# Altium PCB esc.PcbDoc (part 1 of 3)
Units mm, origin at the board's own origin, x right, y up, seen from the top; angles counter-clockwise.
Board outline 31 x 31 mm, 4 copper layers (Top Layer, Ground, Power, Bottom Layer), stack 0.971 mm thick; 336 components, 195 nets, 854 pads, 360 vias.
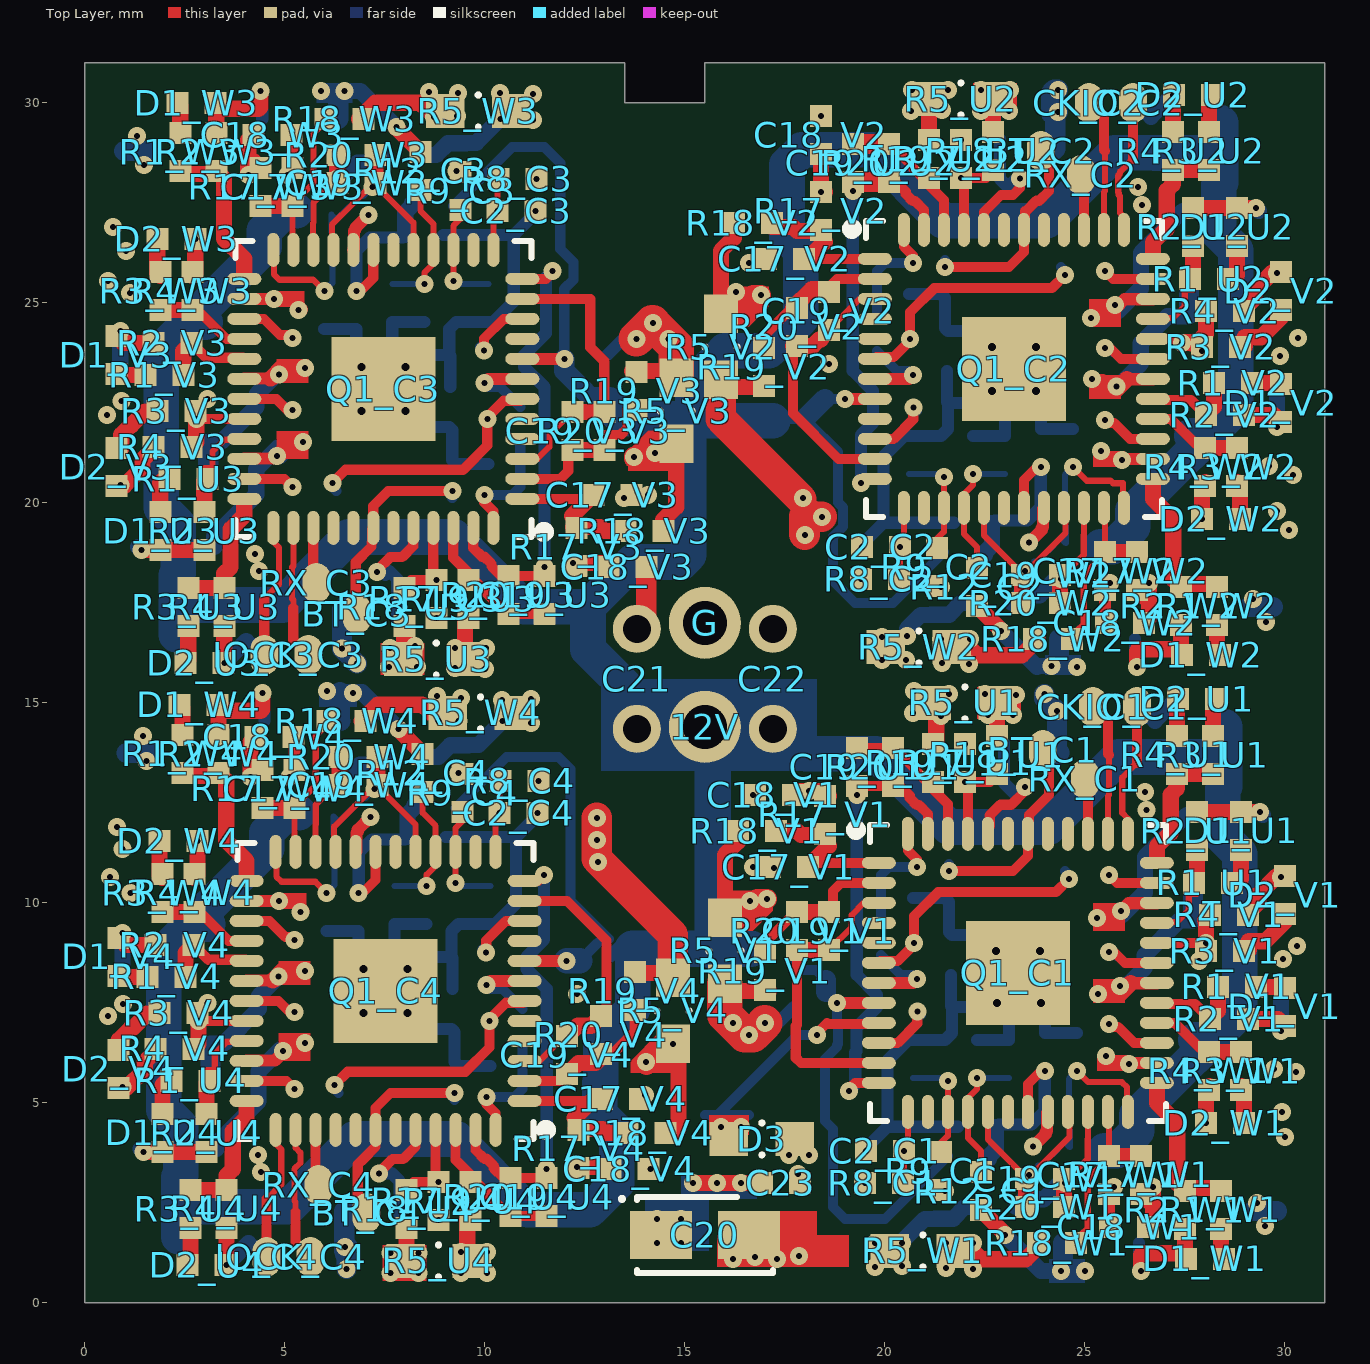
[diagram p0: Top Layer view]
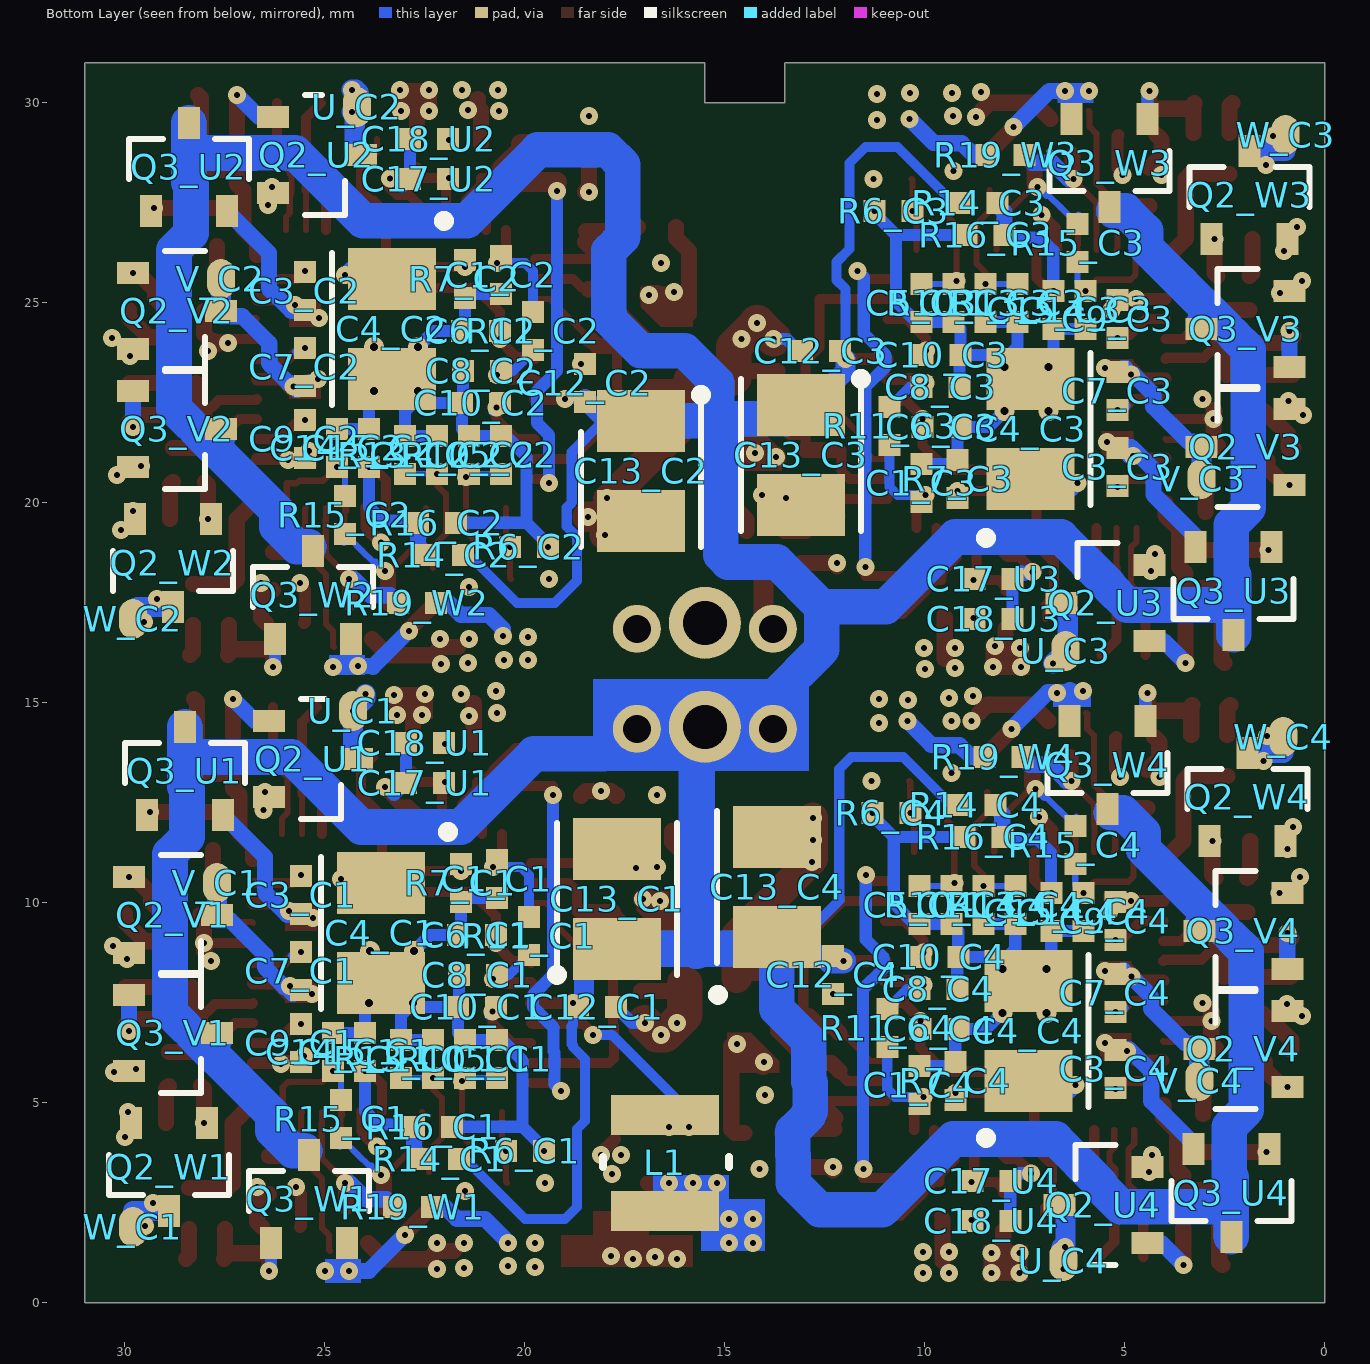
[diagram p1: Bottom Layer view, seen from below]
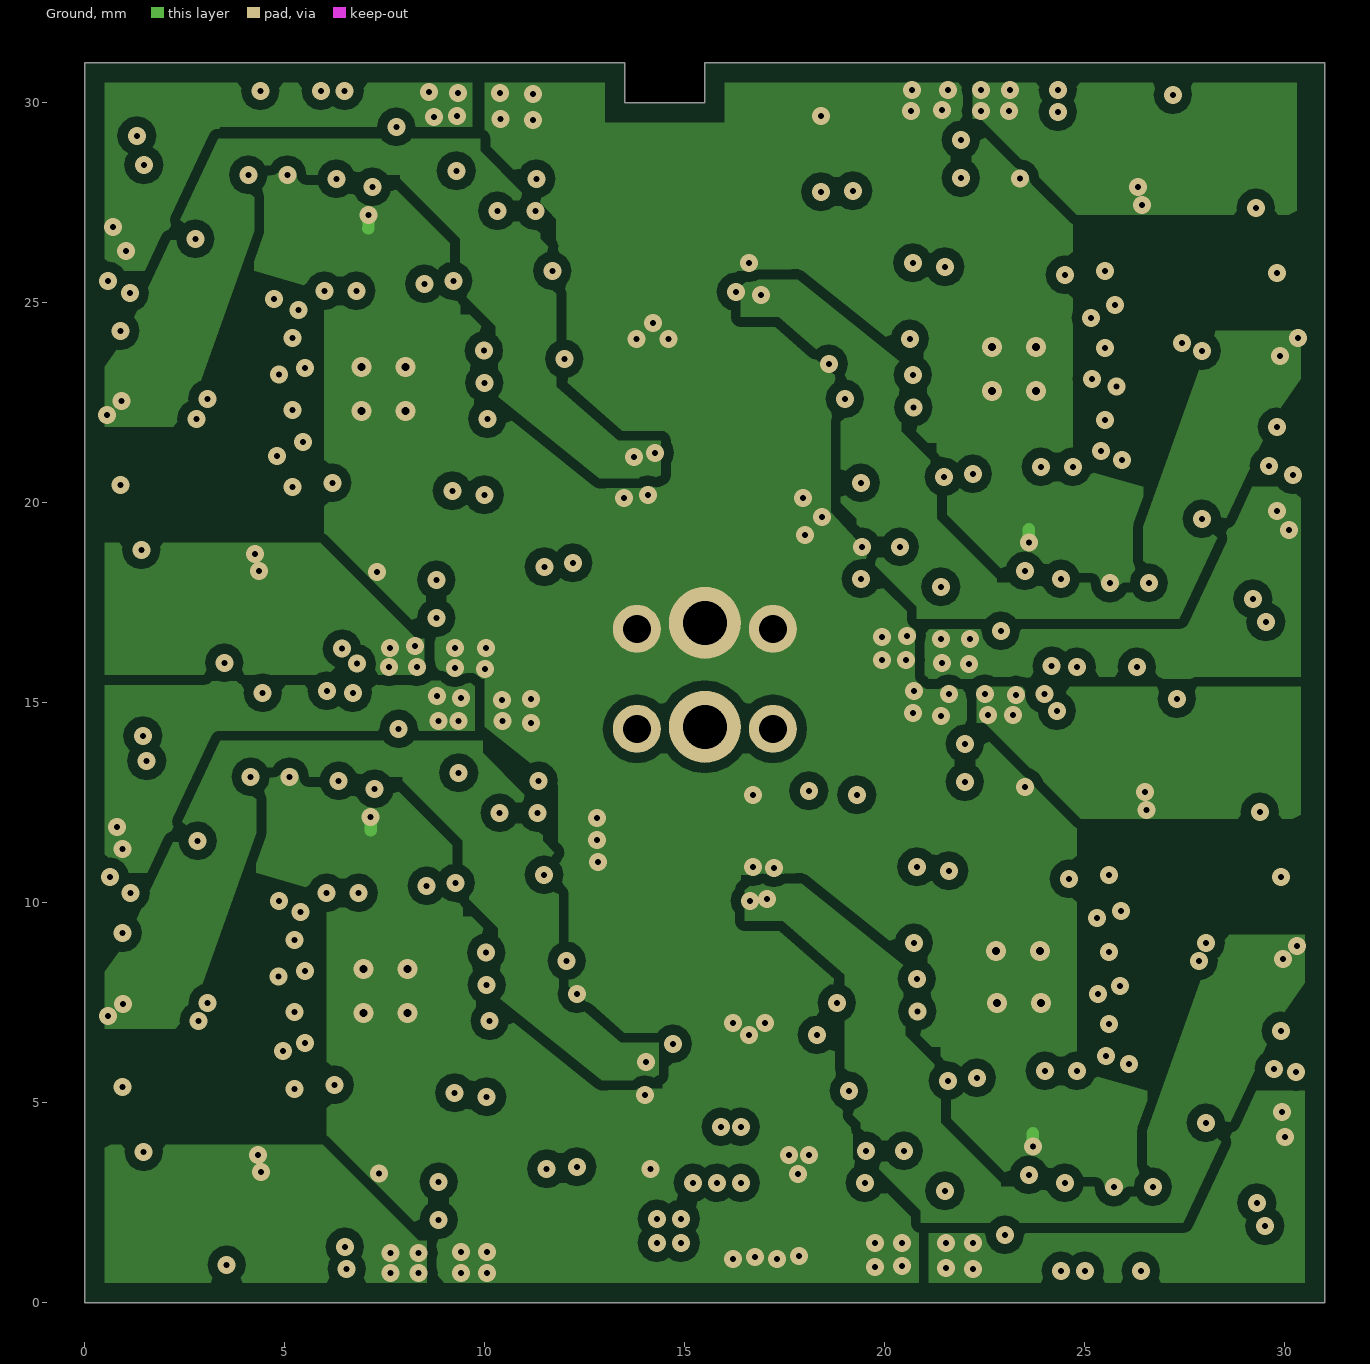
[diagram p2: Ground]
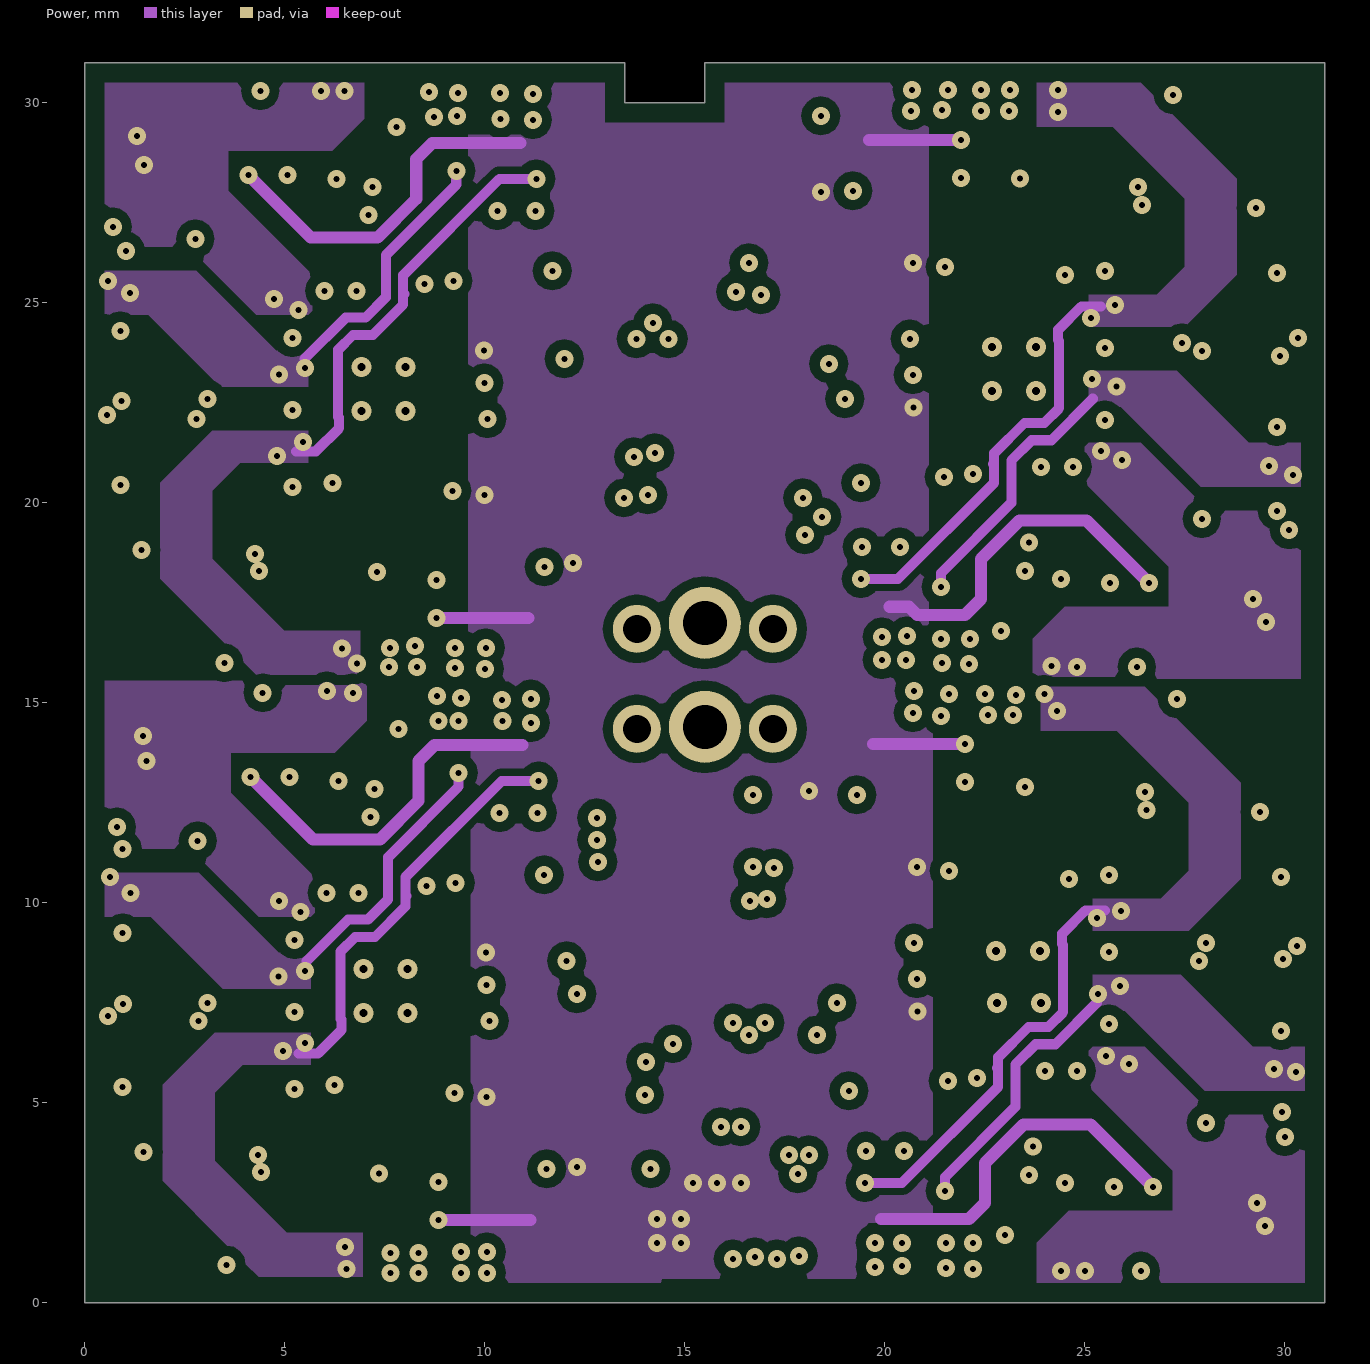
[diagram p3: Power]

## Layer stack, top to bottom
Top Solder: solder mask 0.0102, Solder Resist, Dk 3.5
Top Layer: signal copper 0.0356
Dielectric 1: dielectric 0.32, FR-4, Dk 4.8
Ground: signal copper 0.036
Dielectric 2: dielectric 0.254, Dk 4.2
Power: signal copper 0.036
Dielectric 3: dielectric 0.254, Dk 4.2
Bottom Layer: signal copper 0.0356
Bottom Solder: solder mask 0.0102, Solder Resist, Dk 3.5

## Board outline
0,0 0,31 13.5,31 13.5,30 15.5,30 15.5,31 31,31 31,0

## Design rules (kind name [scope] priority, off if disabled: settings)
Clearance Clearance_fake_net [HasFootprint('fake_net')] p1: gap=0 ignorepadtopadclearanceinfootprint=FALSE
Clearance Clearance_fake_net_2 [HasFootprint('fake_net_10mil')] p2: gap=0 ignorepadtopadclearanceinfootprint=FALSE
Clearance Clearance_fake_net_1 [HasFootprint('fake_net_30mil')] p3: gap=0 ignorepadtopadclearanceinfootprint=FALSE
Clearance [All] p4: gap=0.178 ignorepadtopadclearanceinfootprint=FALSE except(0: Arc-Hole Track-Hole SMDPad-Hole THPad-Hole Via-Hole Fill-Hole Poly-Hole Region-Hole Text-Hole; 0.254: THPad-THPad THPad-Via THPad-Fill THPad-Poly THPad-Region THPad-Text Via-Via Via-Fill Via-Poly Via-Region Via-Text Fill-Fill Fill-Poly Fill-Region Fill-Text Poly-Poly Poly-Region Poly-Text Region-Region Region-Text Text-Text)
ComponentClearance [All] p1: gap=0.152 collisioncheckmode=3 verticalgap=0.254 showdistances=FALSE
HoleToHoleClearance [All] p1: gap=0.229 allowstackedmicrovias=TRUE
MinimumSolderMaskSliver [All] p1: minsoldermaskwidth=0.102
PlaneClearance [All] p1: clearance=0.203
PlaneConnect [All] p1: planeconnectstyle=Direct reliefexpansion=0.508 reliefentries=4 reliefconductorwidth=0.254 reliefairgap=0.254
PolygonConnect PolygonConnect_bottom [OnLayer('Bottom Layer') And IsPolygon] p1: connectstyle=Relief reliefconductorwidth=0.152 reliefentries=4 polygonreliefangle="90 Angle" airgapwidth=0.152
PolygonConnect [All] p2: connectstyle=Direct reliefconductorwidth=0.152 reliefentries=4 polygonreliefangle="90 Angle" airgapwidth=0.152
RoutingVias [All] p1: holewidth=0.15 width=0.45 viastyle="Through Hole" minholewidth=0.15 minwidth=0.45 maxholewidth=0.15 maxwidth=0.45
SilkToSolderMaskClearance [IsPad] p1: minsilkscreentomaskgap=0.127 clearancetoexposedcopper=TRUE
SolderMaskExpansion [All] p1: expansion=0.102
Width Width_hc [InNetClass('hc')] p1: maxlimit=12.7 minlimit=0.254 preferedwidth=0.254
Width [All] p2: maxlimit=12.7 minlimit=0.152 preferedwidth=0.254
24 further rules are at their usual default settings.

## Classes and differential pairs
net class hc: GND NetC3_C1_2 NetC3_C2_2 NetC3_C3_2 NetC3_C4_2 NetC7_C1_2 NetC7_C2_2 NetC7_C3_2 NetC7_C4_2 NetC9_C1_2 NetC9_C2_2 NetC9_C3_2 NetC9_C4_2 NetQ2_U1_S NetQ2_U2_S NetQ2_U3_S NetQ2_U4_S NetQ2_V1_S NetQ2_V2_S NetQ2_V3_S NetQ2_V4_S NetQ2_W1_S NetQ2_W2_S NetQ2_W3_S NetQ2_W4_S VBUS
component class C1: BT_C1 C1_C1 C2_C1 C3_C1 C4_C1 C5_C1 C6_C1 C7_C1 C8_C1 C9_C1 C10_C1 C11_C1 C12_C1 C13_C1 C14_C1 C15_C1 CK_C1 IO_C1 Q1_C1 R6_C1 R7_C1 R8_C1 R9_C1 R10_C1 R11_C1 R12_C1 R13_C1 R14_C1 R15_C1 R16_C1 RX_C1 U_C1 V_C1 W_C1
component class C2: BT_C2 C1_C2 C2_C2 C3_C2 C4_C2 C5_C2 C6_C2 C7_C2 C8_C2 C9_C2 C10_C2 C11_C2 C12_C2 C13_C2 C14_C2 C15_C2 CK_C2 IO_C2 Q1_C2 R6_C2 R7_C2 R8_C2 R9_C2 R10_C2 R11_C2 R12_C2 R13_C2 R14_C2 R15_C2 R16_C2 RX_C2 U_C2 V_C2 W_C2
component class C3: BT_C3 C1_C3 C2_C3 C3_C3 C4_C3 C5_C3 C6_C3 C7_C3 C8_C3 C9_C3 C10_C3 C11_C3 C12_C3 C13_C3 C14_C3 C15_C3 CK_C3 IO_C3 Q1_C3 R6_C3 R7_C3 R8_C3 R9_C3 R10_C3 R11_C3 R12_C3 R13_C3 R14_C3 R15_C3 R16_C3 RX_C3 U_C3 V_C3 W_C3
component class C4: BT_C4 C1_C4 C2_C4 C3_C4 C4_C4 C5_C4 C6_C4 C7_C4 C8_C4 C9_C4 C10_C4 C11_C4 C12_C4 C13_C4 C14_C4 C15_C4 CK_C4 IO_C4 Q1_C4 R6_C4 R7_C4 R8_C4 R9_C4 R10_C4 R11_C4 R12_C4 R13_C4 R14_C4 R15_C4 R16_C4 RX_C4 U_C4 V_C4 W_C4
component class esc: 12V C20 C21 C22 C23 D3 G L1
component class U1: C17_U1 C18_U1 C19_U1 D1_U1 D2_U1 Q2_U1 Q3_U1 R1_U1 R2_U1 R3_U1 R4_U1 R5_U1 R17_U1 R18_U1 R19_U1 R20_U1
component class U2: C17_U2 C18_U2 C19_U2 D1_U2 D2_U2 Q2_U2 Q3_U2 R1_U2 R2_U2 R3_U2 R4_U2 R5_U2 R17_U2 R18_U2 R19_U2 R20_U2
component class U3: C17_U3 C18_U3 C19_U3 D1_U3 D2_U3 Q2_U3 Q3_U3 R1_U3 R2_U3 R3_U3 R4_U3 R5_U3 R17_U3 R18_U3 R19_U3 R20_U3
component class U4: C17_U4 C18_U4 C19_U4 D1_U4 D2_U4 Q2_U4 Q3_U4 R1_U4 R2_U4 R3_U4 R4_U4 R5_U4 R17_U4 R18_U4 R19_U4 R20_U4
component class V1: C17_V1 C18_V1 C19_V1 D1_V1 D2_V1 Q2_V1 Q3_V1 R1_V1 R2_V1 R3_V1 R4_V1 R5_V1 R17_V1 R18_V1 R19_V1 R20_V1
component class V2: C17_V2 C18_V2 C19_V2 D1_V2 D2_V2 Q2_V2 Q3_V2 R1_V2 R2_V2 R3_V2 R4_V2 R5_V2 R17_V2 R18_V2 R19_V2 R20_V2
component class V3: C17_V3 C18_V3 C19_V3 D1_V3 D2_V3 Q2_V3 Q3_V3 R1_V3 R2_V3 R3_V3 R4_V3 R5_V3 R17_V3 R18_V3 R19_V3 R20_V3
component class V4: C17_V4 C18_V4 C19_V4 D1_V4 D2_V4 Q2_V4 Q3_V4 R1_V4 R2_V4 R3_V4 R4_V4 R5_V4 R17_V4 R18_V4 R19_V4 R20_V4
component class W1: C17_W1 C18_W1 C19_W1 D1_W1 D2_W1 Q2_W1 Q3_W1 R1_W1 R2_W1 R3_W1 R4_W1 R5_W1 R17_W1 R18_W1 R19_W1 R20_W1
component class W2: C17_W2 C18_W2 C19_W2 D1_W2 D2_W2 Q2_W2 Q3_W2 R1_W2 R2_W2 R3_W2 R4_W2 R5_W2 R17_W2 R18_W2 R19_W2 R20_W2
component class W3: C17_W3 C18_W3 C19_W3 D1_W3 D2_W3 Q2_W3 Q3_W3 R1_W3 R2_W3 R3_W3 R4_W3 R5_W3 R17_W3 R18_W3 R19_W3 R20_W3
component class W4: C17_W4 C18_W4 C19_W4 D1_W4 D2_W4 Q2_W4 Q3_W4 R1_W4 R2_W4 R3_W4 R4_W4 R5_W4 R17_W4 R18_W4 R19_W4 R20_W4
net class short: GND NetD1_U1_1 NetD1_U1_2 NetD1_U2_1 NetD1_U2_2 NetD1_U3_1 NetD1_U3_2 NetD1_U4_1 NetD1_U4_2 NetD1_V1_1 NetD1_V1_2 NetD1_V2_1 NetD1_V2_2 NetD1_V3_1 NetD1_V3_2 NetD1_V4_1 NetD1_V4_2 NetD1_W1_1 NetD1_W1_2 NetD1_W2_1 NetD1_W2_2 NetD1_W3_1 NetD1_W3_2 NetD1_W4_1 NetD1_W4_2 NetD2_U1_1 NetD2_U2_1 NetD2_U3_1 NetD2_U4_1 NetD2_V1_1 NetD2_V2_1 NetD2_V3_1 NetD2_V4_1 NetD2_W1_1 NetD2_W2_1 NetD2_W3_1 NetD2_W4_1 NetD3_2 NetQ1_C1_25 NetQ1_C1_28 NetQ1_C1_29 NetQ1_C1_32 NetQ1_C1_33 NetQ1_C1_36 NetQ1_C2_25 NetQ1_C2_28 NetQ1_C2_29 NetQ1_C2_32 NetQ1_C2_33 NetQ1_C2_36 NetQ1_C3_25 NetQ1_C3_28 NetQ1_C3_29 NetQ1_C3_32 NetQ1_C3_33 NetQ1_C3_36 NetQ1_C4_25 NetQ1_C4_28 NetQ1_C4_29 NetQ1_C4_32 NetQ1_C4_33 NetQ1_C4_36 NetQ2_U1_S NetQ2_U2_S NetQ2_U3_S NetQ2_U4_S NetQ2_V1_S NetQ2_V2_S NetQ2_V3_S NetQ2_V4_S NetQ2_W1_S NetQ2_W2_S NetQ2_W3_S NetQ2_W4_S SN1_C1 SN1_C2 SN1_C3 SN1_C4 SN2_C1 SN2_C2 SN2_C3 SN2_C4 SN3_C1 SN3_C2 SN3_C3 SN3_C4 SO1_C1 SO1_C2 SO1_C3 SO1_C4 SO2_C1 SO2_C2 SO2_C3 SO2_C4 SO3_C1 SO3_C2 SO3_C3 SO3_C4 SP1_C1 SP1_C2 SP1_C3 SP1_C4 SP2_C1 SP2_C2 SP2_C3 SP2_C4 SP3_C1 SP3_C2 SP3_C3 SP3_C4
channel class channel: C1 C2 C3 C4
channel class driver: U1 U2 U3 U4 V1 V2 V3 V4 W1 W2 W3 W4

## Components (designator, comment, footprint, x,y, rotation, side; value= is the part's Value field where it differs from the comment)
12V "12V" large_pin 15.5,14.4 r0 top
BT_C1 "BT" solder_pin_small#1 -3.99,13.825 r180 top (schematic designator BT)
BT_C2 "BT" solder_pin_small#2 23.9,28.8 r180 top (schematic designator BT)
BT_C3 "BT" solder_pin_small#2 6.8,17.225 r0 top (schematic designator BT)
BT_C4 "BT" solder_pin_small#2 7.041,2.25 r0 top (schematic designator BT)
C1_C1 "100nF" MY_0402 20.7,10.6 r90 bottom (schematic designator C1)
C1_C2 "100nF" MY_0402 20.6,25.7 r90 bottom (schematic designator C1)
C1_C3 "100nF" MY_0402 10.085,20.5 r270 bottom (schematic designator C1)
C1_C4 "100nF" MY_0402 10.141,5.45 r270 bottom (schematic designator C1)
C2_C1 "100nF" MY_0402 20,3.8 r180 top value=4.7nF (schematic designator C2)
C2_C2 "100nF" MY_0402 19.9,18.9 r180 top value=4.7nF (schematic designator C2)
C2_C3 "100nF" MY_0402 10.785,27.3 r0 top value=4.7nF (schematic designator C2)
C2_C4 "100nF" MY_0402 10.841,12.25 r0 top value=4.7nF (schematic designator C2)
C3_C1 "100nF/25V" MY_0402 25.6,10.2 r270 bottom value=100nF (schematic designator C3)
C3_C2 "100nF/25V" MY_0402 25.5,25.3 r270 bottom value=100nF (schematic designator C3)
C3_C3 "100nF/25V" MY_0402 5.185,20.9 r90 bottom value=100nF (schematic designator C3)
C3_C4 "100nF/25V" MY_0402 5.241,5.85 r90 bottom value=100nF (schematic designator C3)
C4_C1 "TCJB226M025R0150" my_1210_pol 23.6,9.25 r270 bottom value="22uF 25V" (schematic designator C4)
C4_C2 "TCJB226M025R0150" my_1210_pol 23.325,24.35 r270 bottom value="22uF 25V" (schematic designator C4)
C4_C3 "TCJB226M025R0150" my_1210_pol 7.36,21.85 r90 bottom value="22uF 25V" (schematic designator C4)
C4_C4 "TCJB226M025R0150" my_1210_pol 7.416,6.8 r90 bottom value="22uF 25V" (schematic designator C4)
C5_C1 "100nF" MY_0402 20.7,6.1 r270 bottom value=4.7nF (schematic designator C5)
C5_C2 "100nF" MY_0402 20.6,21.2 r270 bottom value=4.7nF (schematic designator C5)
C5_C3 "100nF" MY_0402 10.085,25 r90 bottom value=4.7nF (schematic designator C5)
C5_C4 "100nF" MY_0402 10.141,9.95 r90 bottom value=4.7nF (schematic designator C5)
C6_C1 "100nF" MY_0402 21.2,9.2 r180 bottom (schematic designator C6)
C6_C2 "100nF" MY_0402 21.1,24.3 r180 bottom (schematic designator C6)
C6_C3 "100nF" MY_0402 9.585,21.9 r0 bottom (schematic designator C6)
C6_C4 "100nF" MY_0402 9.641,6.85 r0 bottom (schematic designator C6)
C7_C1 "100nF/25V" MY_0402 25.6,8.3 r270 bottom value=100nF (schematic designator C7)
C7_C2 "100nF/25V" MY_0402 25.5,23.4 r270 bottom value=100nF (schematic designator C7)
C7_C3 "100nF/25V" MY_0402 5.185,22.8 r90 bottom value=100nF (schematic designator C7)
C7_C4 "100nF/25V" MY_0402 5.241,7.75 r90 bottom value=100nF (schematic designator C7)
C8_C1 "3.3nF" MY_0402 21.175,8.2 r0 bottom value=100nF (schematic designator C8)
C8_C2 "3.3nF" MY_0402 21.075,23.3 r0 bottom value=100nF (schematic designator C8)
C8_C3 "3.3nF" MY_0402 9.61,22.9 r180 bottom value=100nF (schematic designator C8)
C8_C4 "3.3nF" MY_0402 9.666,7.85 r180 bottom value=100nF (schematic designator C8)
C9_C1 "100nF/25V" MY_0402 25.6,6.5 r270 bottom value=100nF (schematic designator C9)
C9_C2 "100nF/25V" MY_0402 25.5,21.6 r270 bottom value=100nF (schematic designator C9)
C9_C3 "100nF/25V" MY_0402 5.185,24.6 r90 bottom value=100nF (schematic designator C9)
C9_C4 "100nF/25V" MY_0402 5.241,9.55 r90 bottom value=100nF (schematic designator C9)
C10_C1 "100nF" MY_0402 21.2,7.4 r0 bottom (schematic designator C10)
C10_C2 "100nF" MY_0402 21.1,22.5 r0 bottom (schematic designator C10)
C10_C3 "100nF" MY_0402 9.585,23.7 r180 bottom (schematic designator C10)
C10_C4 "100nF" MY_0402 9.641,8.65 r180 bottom (schematic designator C10)
C11_C1 "100nF" MY_0402 22.3,6.1 r270 bottom value=4.7nF (schematic designator C11)
C11_C2 "100nF" MY_0402 22.2,21.2 r270 bottom value=4.7nF (schematic designator C11)
C11_C3 "100nF" MY_0402 8.485,25 r90 bottom value=4.7nF (schematic designator C11)
C11_C4 "100nF" MY_0402 8.541,9.95 r90 bottom value=4.7nF (schematic designator C11)
C12_C1 "220nF/25V" MY_0402 18.2,7.4 r180 bottom value=100nF (schematic designator C12)
C12_C2 "220nF/25V" MY_0402 18.5,23 r90 bottom value=100nF (schematic designator C12)
C12_C3 "220nF/25V" MY_0402 12.6,23.8 r0 bottom value=100nF (schematic designator C12)
C12_C4 "220nF/25V" MY_0402 12.3,8.2 r270 bottom value=100nF (schematic designator C12)
C13_C1 "TCJB226M025R0150" my_1210_pol 17.7,10.1 r90 bottom value="22uF 25V" (schematic designator C13)
C13_C2 "TCJB226M025R0150" my_1210_pol 17.1,20.8 r270 bottom value="22uF 25V" (schematic designator C13)
C13_C3 "TCJB226M025R0150" my_1210_pol 13.1,21.2 r270 bottom value="22uF 25V" (schematic designator C13)
C13_C4 "TCJB226M025R0150" my_1210_pol 13.7,10.4 r90 bottom value="22uF 25V" (schematic designator C13)
C14_C1 "220pF" MY_0402 24.8,6.275 r90 bottom value=4.7nF (schematic designator C14)
C14_C2 "220pF" MY_0402 24.7,21.375 r90 bottom value=4.7nF (schematic designator C14)
C14_C3 "220pF" MY_0402 5.985,24.825 r270 bottom value=4.7nF (schematic designator C14)
C14_C4 "220pF" MY_0402 6.041,9.775 r270 bottom value=4.7nF (schematic designator C14)
C15_C1 "4.7nF" MY_0402 24,6.275 r90 bottom (schematic designator C15)
C15_C2 "4.7nF" MY_0402 23.9,21.375 r90 bottom (schematic designator C15)
C15_C3 "4.7nF" MY_0402 6.785,24.825 r270 bottom (schematic designator C15)
C15_C4 "4.7nF" MY_0402 6.841,9.775 r270 bottom (schematic designator C15)
C17_U1 "680pF" MY_0402 22.5,13 r0 bottom value=10nF (schematic designator C17)
C17_U2 "680pF" MY_0402 22.4,28.1 r0 bottom value=10nF (schematic designator C17)
C17_U3 "680pF" MY_0402 8.285,18.1 r180 bottom value=10nF (schematic designator C17)
C17_U4 "680pF" MY_0402 8.341,3.05 r180 bottom value=10nF (schematic designator C17)
C17_V1 "680pF" MY_0402 17.6,10.9 r180 top value=10nF (schematic designator C17)
C17_V2 "680pF" MY_0402 17.5,26.1 r180 top value=10nF (schematic designator C17)
C17_V3 "680pF" MY_0402 13.185,20.2 r0 top value=10nF (schematic designator C17)
C17_V4 "680pF" MY_0402 13.4,5.1 r0 top value=10nF (schematic designator C17)
C17_W1 "680pF" MY_0402 25.6,3.2 r270 top value=10nF (schematic designator C17)
C17_W2 "680pF" MY_0402 25.5,18.3 r270 top value=10nF (schematic designator C17)
C17_W3 "680pF" MY_0402 5.185,27.9 r90 top value=10nF (schematic designator C17)
C17_W4 "680pF" MY_0402 5.241,12.85 r90 top value=10nF (schematic designator C17)
C18_U1 "100nF" MY_0402 22.5,14 r180 bottom value=10nF (schematic designator C18)
C18_U2 "100nF" MY_0402 22.4,29.1 r180 bottom value=10nF (schematic designator C18)
C18_U3 "100nF" MY_0402 8.285,17.1 r0 bottom value=10nF (schematic designator C18)
C18_U4 "100nF" MY_0402 8.341,2.05 r0 bottom value=10nF (schematic designator C18)
C18_V1 "100nF" MY_0402 17.225,12.7 r0 top value=10nF (schematic designator C18)
C18_V2 "100nF" MY_0402 18.4,29.2 r270 top value=10nF (schematic designator C18)
C18_V3 "100nF" MY_0402 13.56,18.4 r180 top value=10nF (schematic designator C18)
C18_V4 "100nF" MY_0402 13.616,3.35 r180 top value=10nF (schematic designator C18)
C18_W1 "100nF" MY_0402 26.1,1.9 r0 top value=10nF (schematic designator C18)
C18_W2 "100nF" MY_0402 26,17 r0 top value=10nF (schematic designator C18)
C18_W3 "100nF" MY_0402 4.685,29.2 r180 top value=10nF (schematic designator C18)
C18_W4 "100nF" MY_0402 4.741,14.15 r180 top value=10nF (schematic designator C18)
C19_U1 "100pf" MY_0402 19.3,13.4 r270 top value=10nF (schematic designator C19)
C19_U2 "100pf" MY_0402 19.2,28.5 r270 top value=10nF (schematic designator C19)
C19_U3 "100pf" MY_0402 11.485,17.7 r90 top value=10nF (schematic designator C19)
C19_U4 "100pf" MY_0402 11.541,2.65 r90 top value=10nF (schematic designator C19)
C19_V1 "100pf" MY_0402 18.6,9.3 r270 top value=10nF (schematic designator C19)
C19_V2 "100pf" MY_0402 18.6,24.8 r270 top value=10nF (schematic designator C19)
C19_V3 "100pf" MY_0402 12.185,21.8 r90 top value=10nF (schematic designator C19)
C19_V4 "100pf" MY_0402 12.05,6.2 r90 top value=10nF (schematic designator C19)
C19_W1 "100pf" MY_0402 24,3.1 r180 top value=10nF (schematic designator C19)
C19_W2 "100pf" MY_0402 23.9,18.2 r180 top value=10nF (schematic designator C19)
C19_W3 "100pf" MY_0402 6.785,28 r0 top value=10nF (schematic designator C19)
C19_W4 "100pf" MY_0402 6.841,12.95 r0 top value=10nF (schematic designator C19)
C20 "TCJA476M006R0100" my_1206_pol 15.5,1.7 r0 top value="47uF 6.3V"
C21 "25PX220MEFCTA6.3X11" rad_2.5mm_0.7mm 13.8,15.6 r90 top value=10uF
C22 "25PX220MEFCTA6.3X11" rad_2.5mm_0.7mm 17.2,15.6 r90 top value=10uF
C23 "100nF" MY_0402 17.4,3 r180 top
CK_C1 "CK" solder_pin_small#3 12.5,14.9 r0 top (schematic designator CK)
CK_C2 "CK" solder_pin_small#2 25.1,30 r0 top (schematic designator CK)
CK_C3 "CK" solder_pin_small#2 5.585,16.2 r180 top (schematic designator CK)
CK_C4 "CK" solder_pin_small#2 5.641,1.15 r180 top (schematic designator CK)
D1_U1 "NSR05F40NXT5G" MY_0402 28.9,11.8 r270 top (schematic designator D1)
D1_U2 "NSR05F40NXT5G" MY_0402 28.8,26.9 r270 top (schematic designator D1)
D1_U3 "NSR05F40NXT5G" MY_0402 1.885,19.3 r90 top (schematic designator D1)
D1_U4 "NSR05F40NXT5G" MY_0402 1.941,4.25 r90 top (schematic designator D1)
D1_V1 "NSR05F40NXT5G" MY_0402 30,7.4 r90 top (schematic designator D1)
D1_V2 "NSR05F40NXT5G" MY_0402 29.9,22.5 r90 top (schematic designator D1)
D1_V3 "NSR05F40NXT5G" MY_0402 0.785,23.7 r270 top (schematic designator D1)
D1_V4 "NSR05F40NXT5G" MY_0402 0.841,8.65 r270 top (schematic designator D1)
D1_W1 "NSR05F40NXT5G" MY_0402 28,1.1 r0 top (schematic designator D1)
D1_W2 "NSR05F40NXT5G" MY_0402 27.9,16.2 r0 top (schematic designator D1)
D1_W3 "NSR05F40NXT5G" MY_0402 2.785,30 r180 top (schematic designator D1)
D1_W4 "NSR05F40NXT5G" MY_0402 2.841,14.95 r180 top (schematic designator D1)
D2_U1 "NSR05F40NXT5G" MY_0402 27.8,15.1 r0 top (schematic designator D2)
D2_U2 "NSR05F40NXT5G" MY_0402 27.7,30.2 r0 top (schematic designator D2)
D2_U3 "NSR05F40NXT5G" MY_0402 2.985,16 r180 top (schematic designator D2)
D2_U4 "NSR05F40NXT5G" MY_0402 3.041,0.95 r180 top (schematic designator D2)
D2_V1 "NSR05F40NXT5G" MY_0402 30,10.2 r270 top (schematic designator D2)
D2_V2 "NSR05F40NXT5G" MY_0402 29.9,25.3 r270 top (schematic designator D2)
D2_V3 "NSR05F40NXT5G" MY_0402 0.785,20.9 r90 top (schematic designator D2)
D2_V4 "NSR05F40NXT5G" MY_0402 0.841,5.85 r90 top (schematic designator D2)
D2_W1 "NSR05F40NXT5G" MY_0402 28.5,4.5 r0 top (schematic designator D2)
D2_W2 "NSR05F40NXT5G" MY_0402 28.4,19.6 r0 top (schematic designator D2)
D2_W3 "NSR05F40NXT5G" MY_0402 2.285,26.6 r180 top (schematic designator D2)
D2_W4 "NSR05F40NXT5G" MY_0402 2.341,11.55 r180 top (schematic designator D2)
D3 "CD0603-B0340R" my_0603 16.925,4.1 r180 top
G "G" large_pin 15.5,17 r90 top
IO_C1 "IO" solder_pin_small#4 13.6,14.9 r180 top (schematic designator IO)
IO_C2 "IO" solder_pin_small#2 26.2,30 r180 top (schematic designator IO)
IO_C3 "IO" solder_pin_small#2 4.485,16.2 r0 top (schematic designator IO)
IO_C4 "IO" solder_pin_small#2 4.541,1.15 r0 top (schematic designator IO)
L1 "74404032220" IND_3_3 16.5,3.5 r90 bottom value="22uH 0.6A"
Q1_C1 "STSPIN32F0A" VFQFPN48 23.325,8.25 r0 top (schematic designator Q1)
Q1_C2 "STSPIN32F0A" VFQFPN48 23.225,23.35 r0 top (schematic designator Q1)
Q1_C3 "STSPIN32F0A" VFQFPN48 7.46,22.85 r180 top (schematic designator Q1)
Q1_C4 "STSPIN32F0A" VFQFPN48 7.516,7.8 r180 top (schematic designator Q1)
Q2_U1 "IRLML0030TRPBF" Micro3 25.3,13.6 r180 bottom (schematic designator Q2)
Q2_U2 "IRLML0030TRPBF" Micro3 25.2,28.7 r180 bottom (schematic designator Q2)
Q2_U3 "IRLML0030TRPBF" Micro3 5.485,17.5 r0 bottom (schematic designator Q2)
Q2_U4 "IRLML0030TRPBF" Micro3 5.541,2.45 r0 bottom (schematic designator Q2)
Q2_V1 "IRLML0030TRPBF" Micro3 28.8,9.7 r180 bottom (schematic designator Q2)
Q2_V2 "IRLML0030TRPBF" Micro3 28.7,24.8 r180 bottom (schematic designator Q2)
Q2_V3 "IRLML0030TRPBF" Micro3 1.985,21.4 r0 bottom (schematic designator Q2)
Q2_V4 "IRLML0030TRPBF" Micro3 2.041,6.35 r0 bottom (schematic designator Q2)
Q2_W1 "IRLML0030TRPBF" Micro3 28.9,3.4 r270 bottom (schematic designator Q2)
Q2_W2 "IRLML0030TRPBF" Micro3 28.8,18.5 r270 bottom (schematic designator Q2)
Q2_W3 "IRLML0030TRPBF" Micro3 1.885,27.7 r90 bottom (schematic designator Q2)
Q2_W4 "IRLML0030TRPBF" Micro3 1.941,12.65 r90 bottom (schematic designator Q2)
Q3_U1 "IRLML0030TRPBF" Micro3 28.5,13.3 r90 bottom (schematic designator Q3)
Q3_U2 "IRLML0030TRPBF" Micro3 28.4,28.4 r90 bottom (schematic designator Q3)
Q3_U3 "IRLML0030TRPBF" Micro3 2.285,17.8 r270 bottom (schematic designator Q3)
Q3_U4 "IRLML0030TRPBF" Micro3 2.341,2.75 r270 bottom (schematic designator Q3)
Q3_V1 "IRLML0030TRPBF" Micro3 28.8,6.75 r180 bottom (schematic designator Q3)
Q3_V2 "IRLML0030TRPBF" Micro3 28.7,21.85 r180 bottom (schematic designator Q3)
Q3_V3 "IRLML0030TRPBF" Micro3 1.985,24.35 r0 bottom (schematic designator Q3)
Q3_V4 "IRLML0030TRPBF" Micro3 2.041,9.3 r0 bottom (schematic designator Q3)
Q3_W1 "IRLML0030TRPBF" Micro3 25.4,2.6 r90 bottom (schematic designator Q3)
Q3_W2 "IRLML0030TRPBF" Micro3 25.3,17.7 r90 bottom (schematic designator Q3)
Q3_W3 "IRLML0030TRPBF" Micro3 5.385,28.5 r270 bottom (schematic designator Q3)
Q3_W4 "IRLML0030TRPBF" Micro3 5.441,13.45 r270 bottom (schematic designator Q3)
R1_U1 "10" MY_0402 28.2,10.5 r0 top (schematic designator R1)
R1_U2 "10" MY_0402 28.1,25.6 r0 top (schematic designator R1)
R1_U3 "10" MY_0402 2.585,20.6 r180 top (schematic designator R1)
R1_U4 "10" MY_0402 2.641,5.55 r180 top (schematic designator R1)
R1_V1 "10" MY_0402 28.8,7.9 r0 top (schematic designator R1)
R1_V2 "10" MY_0402 28.7,23 r0 top (schematic designator R1)
R1_V3 "10" MY_0402 1.985,23.2 r180 top (schematic designator R1)
R1_V4 "10" MY_0402 2.041,8.15 r180 top (schematic designator R1)
R1_W1 "10" MY_0402 28.4,2.325 r270 top (schematic designator R1)
R1_W2 "10" MY_0402 28.3,17.425 r270 top (schematic designator R1)
R1_W3 "10" MY_0402 2.385,28.775 r90 top (schematic designator R1)
R1_W4 "10" MY_0402 2.441,13.725 r90 top (schematic designator R1)
R2_U1 "50" MY_0402 27.8,11.8 r90 top (schematic designator R2)
R2_U2 "50" MY_0402 27.7,26.9 r90 top (schematic designator R2)
R2_U3 "50" MY_0402 2.985,19.3 r270 top (schematic designator R2)
R2_U4 "50" MY_0402 3.041,4.25 r270 top (schematic designator R2)
R2_V1 "50" MY_0402 28.6,7.1 r0 top (schematic designator R2)
R2_V2 "50" MY_0402 28.5,22.2 r0 top (schematic designator R2)
R2_V3 "50" MY_0402 2.185,24 r180 top (schematic designator R2)
R2_V4 "50" MY_0402 2.241,8.95 r180 top (schematic designator R2)
R2_W1 "50" MY_0402 27.5,2.325 r270 top (schematic designator R2)
R2_W2 "50" MY_0402 27.4,17.425 r270 top (schematic designator R2)
R2_W3 "50" MY_0402 3.285,28.775 r90 top (schematic designator R2)
R2_W4 "50" MY_0402 3.341,13.725 r90 top (schematic designator R2)
R3_U1 "10" MY_0402 28.2,13.7 r90 top (schematic designator R3)
R3_U2 "10" MY_0402 28.1,28.8 r90 top (schematic designator R3)
R3_U3 "10" MY_0402 2.585,17.4 r270 top (schematic designator R3)
R3_U4 "10" MY_0402 2.641,2.35 r270 top (schematic designator R3)
R3_V1 "10" MY_0402 28.5,8.8 r0 top (schematic designator R3)
R3_V2 "10" MY_0402 28.4,23.9 r0 top (schematic designator R3)
R3_V3 "10" MY_0402 2.285,22.3 r180 top (schematic designator R3)
R3_V4 "10" MY_0402 2.341,7.25 r180 top (schematic designator R3)
R3_W1 "10" MY_0402 28.9,5.8 r270 top (schematic designator R3)
R3_W2 "10" MY_0402 28.8,20.9 r270 top (schematic designator R3)
R3_W3 "10" MY_0402 1.885,25.3 r90 top (schematic designator R3)
R3_W4 "10" MY_0402 1.941,10.25 r90 top (schematic designator R3)
R4_U1 "50" MY_0402 27.3,13.7 r90 top (schematic designator R4)
R4_U2 "50" MY_0402 27.2,28.8 r90 top (schematic designator R4)
R4_U3 "50" MY_0402 3.485,17.4 r270 top (schematic designator R4)
R4_U4 "50" MY_0402 3.541,2.35 r270 top (schematic designator R4)
R4_V1 "50" MY_0402 28.6,9.7 r0 top (schematic designator R4)
R4_V2 "50" MY_0402 28.5,24.8 r0 top (schematic designator R4)
R4_V3 "50" MY_0402 2.185,21.4 r180 top (schematic designator R4)
R4_V4 "50" MY_0402 2.241,6.35 r180 top (schematic designator R4)
R4_W1 "50" MY_0402 28.1,5.8 r270 top (schematic designator R4)
R4_W2 "50" MY_0402 28,20.9 r270 top (schematic designator R4)
R4_W3 "50" MY_0402 2.685,25.3 r90 top (schematic designator R4)
R4_W4 "50" MY_0402 2.741,10.25 r90 top (schematic designator R4)
R5_U1 "0.01" MY_0603 22,15 r0 top value=1K (schematic designator R5)
R5_U2 "0.01" MY_0603 21.9,30.1 r0 top value=1K (schematic designator R5)
R5_U3 "0.01" MY_0603 8.785,16.1 r180 top value=1K (schematic designator R5)
R5_U4 "0.01" MY_0603 8.841,1.05 r180 top value=1K (schematic designator R5)
R5_V1 "0.01" MY_0603 16,8.8 r90 top value=1K (schematic designator R5)
R5_V2 "0.01" MY_0603 15.9,23.9 r90 top value=1K (schematic designator R5)
R5_V3 "0.01" MY_0603 14.785,22.3 r270 top value=1K (schematic designator R5)
R5_V4 "0.01" MY_0603 14.7,7.3 r270 top value=1K (schematic designator R5)
R5_W1 "0.01" MY_0603 20.95,1.3 r0 top value=1K (schematic designator R5)
R5_W2 "0.01" MY_0603 20.85,16.4 r0 top value=1K (schematic designator R5)
R5_W3 "0.01" MY_0603 9.835,29.8 r180 top value=1K (schematic designator R5)
R5_W4 "0.01" MY_0603 9.891,14.75 r180 top value=1K (schematic designator R5)
R6_C1 "4.02k" MY_0402 20,3.8 r0 bottom value=10K (schematic designator R6)
R6_C2 "4.02k" MY_0402 19.9,18.9 r0 bottom value=10K (schematic designator R6)
R6_C3 "4.02k" MY_0402 10.785,27.3 r180 bottom value=10K (schematic designator R6)
R6_C4 "4.02k" MY_0402 10.841,12.25 r180 bottom value=10K (schematic designator R6)
R7_C1 "10k" MY_0402 21.6,10.5 r90 bottom value=10K (schematic designator R7)
R7_C2 "10k" MY_0402 21.5,25.6 r90 bottom value=10K (schematic designator R7)
R7_C3 "10k" MY_0402 9.185,20.6 r270 bottom value=10K (schematic designator R7)
R7_C4 "10k" MY_0402 9.241,5.55 r270 bottom value=10K (schematic designator R7)
R8_C1 "33k" MY_0402 19.975,3 r0 top value=10K (schematic designator R8)
R8_C2 "33k" MY_0402 19.875,18.1 r0 top value=10K (schematic designator R8)
R8_C3 "33k" MY_0402 10.81,28.1 r180 top value=10K (schematic designator R8)
R8_C4 "33k" MY_0402 10.866,13.05 r180 top value=10K (schematic designator R8)
R9_C1 "33k" MY_0402 21.4,3.3 r270 top value=10K (schematic designator R9)
R9_C2 "33k" MY_0402 21.3,18.4 r270 top value=10K (schematic designator R9)
R9_C3 "33k" MY_0402 9.385,27.8 r90 top value=10K (schematic designator R9)
R9_C4 "33k" MY_0402 9.441,12.75 r90 top value=10K (schematic designator R9)
R10_C1 "4.02k" MY_0402 21.5,6.1 r90 bottom value=10K (schematic designator R10)
R10_C2 "4.02k" MY_0402 21.4,21.2 r90 bottom value=10K (schematic designator R10)
R10_C3 "4.02k" MY_0402 9.285,25 r270 bottom value=10K (schematic designator R10)
R10_C4 "4.02k" MY_0402 9.341,9.95 r270 bottom value=10K (schematic designator R10)
R11_C1 "39k" MY_0402 19.9,9.175 r270 bottom value=10K (schematic designator R11)
R11_C2 "39k" MY_0402 19.8,24.3 r270 bottom value=10K (schematic designator R11)
R11_C3 "39k" MY_0402 10.885,21.925 r90 bottom value=10K (schematic designator R11)
R11_C4 "39k" MY_0402 10.941,6.875 r90 bottom value=10K (schematic designator R11)
R12_C1 "33k" MY_0402 22.4,2.8 r270 top value=10K (schematic designator R12)
R12_C2 "33k" MY_0402 22.3,17.9 r270 top value=10K (schematic designator R12)
R12_C3 "33k" MY_0402 8.385,28.3 r90 top value=10K (schematic designator R12)
R12_C4 "33k" MY_0402 8.441,13.25 r90 top value=10K (schematic designator R12)
R13_C1 "4.02k" MY_0402 23.1,6.1 r90 bottom value=10K (schematic designator R13)
R13_C2 "4.02k" MY_0402 23,21.2 r90 bottom value=10K (schematic designator R13)
R13_C3 "4.02k" MY_0402 7.685,25 r270 bottom value=10K (schematic designator R13)
R13_C4 "4.02k" MY_0402 7.741,9.95 r270 bottom value=10K (schematic designator R13)
R14_C1 "169K" MY_0402 22.125,3.6 r180 bottom value=10K (schematic designator R14)
R14_C2 "169K" MY_0402 22.025,18.7 r180 bottom value=10K (schematic designator R14)
R14_C3 "169K" MY_0402 8.66,27.5 r0 bottom value=10K (schematic designator R14)
R14_C4 "169K" MY_0402 8.716,12.45 r0 bottom value=10K (schematic designator R14)
R15_C1 "4.7k" MY_0402 24.6,4.6 r90 bottom value=10K (schematic designator R15)
R15_C2 "4.7k" MY_0402 24.5,19.7 r90 bottom value=10K (schematic designator R15)
R15_C3 "4.7k" MY_0402 6.185,26.5 r270 bottom value=10K (schematic designator R15)
R15_C4 "4.7k" MY_0402 6.241,11.45 r270 bottom value=10K (schematic designator R15)
R16_C1 "9.31K" MY_0402 22.3,4.4 r0 bottom value=10K (schematic designator R16)
R16_C2 "9.31K" MY_0402 22.2,19.5 r0 bottom value=10K (schematic designator R16)
R16_C3 "9.31K" MY_0402 8.485,26.7 r180 bottom value=10K (schematic designator R16)
R16_C4 "9.31K" MY_0402 8.541,11.65 r180 bottom value=10K (schematic designator R16)
R17_U1 "8.2k" MY_0402 22,13.5 r90 top value=1K (schematic designator R17)
R17_U2 "8.2k" MY_0402 21.9,28.6 r90 top value=1K (schematic designator R17)
R17_U3 "8.2k" MY_0402 8.785,17.6 r270 top value=1K (schematic designator R17)
R17_U4 "8.2k" MY_0402 8.841,2.55 r270 top value=1K (schematic designator R17)
R17_V1 "8.2k" MY_0402 18.5,12.2 r90 top value=1K (schematic designator R17)
R17_V2 "8.2k" MY_0402 18.4,27.3 r90 top value=1K (schematic designator R17)
R17_V3 "8.2k" MY_0402 12.285,18.9 r270 top value=1K (schematic designator R17)
R17_V4 "8.2k" MY_0402 12.341,3.85 r270 top value=1K (schematic designator R17)
R17_W1 "8.2k" MY_0402 26.4,3.2 r270 top value=1K (schematic designator R17)
R17_W2 "8.2k" MY_0402 26.3,18.3 r270 top value=1K (schematic designator R17)
R17_W3 "8.2k" MY_0402 4.385,27.9 r90 top value=1K (schematic designator R17)
R17_W4 "8.2k" MY_0402 4.441,12.85 r90 top value=1K (schematic designator R17)
R18_U1 "560" MY_0402 22.8,13.7 r270 top value=1K (schematic designator R18)
R18_U2 "560" MY_0402 22.7,28.8 r270 top value=1K (schematic designator R18)
R18_U3 "560" MY_0402 7.985,17.4 r90 top value=1K (schematic designator R18)
R18_U4 "560" MY_0402 8.041,2.35 r90 top value=1K (schematic designator R18)
R18_V1 "560" MY_0402 16.8,11.8 r0 top value=1K (schematic designator R18)
R18_V2 "560" MY_0402 16.7,27 r0 top value=1K (schematic designator R18)
R18_V3 "560" MY_0402 13.985,19.3 r180 top value=1K (schematic designator R18)
R18_V4 "560" MY_0402 14.041,4.25 r180 top value=1K (schematic designator R18)
R18_W1 "560" MY_0402 24.3,1.5 r0 top value=1K (schematic designator R18)
R18_W2 "560" MY_0402 24.2,16.6 r0 top value=1K (schematic designator R18)
R18_W3 "560" MY_0402 6.485,29.6 r180 top value=1K (schematic designator R18)
R18_W4 "560" MY_0402 6.541,14.55 r180 top value=1K (schematic designator R18)
R19_U1 "1k" MY_0402 21.2,13.5 r270 top value=1K (schematic designator R19)
R19_U2 "1k" MY_0402 21.1,28.6 r270 top value=1K (schematic designator R19)
R19_U3 "1k" MY_0402 9.585,17.6 r90 top value=1K (schematic designator R19)
R19_U4 "1k" MY_0402 9.641,2.55 r90 top value=1K (schematic designator R19)
R19_V1 "1k" MY_0402 17,8.3 r90 top value=1K (schematic designator R19)
R19_V2 "1k" MY_0402 16.975,23.4 r90 top value=1K (schematic designator R19)
R19_V3 "1k" MY_0402 13.785,22.8 r270 top value=1K (schematic designator R19)
R19_V4 "1k" MY_0402 13.75,7.8 r270 top value=1K (schematic designator R19)
R19_W1 "1k" MY_0402 22.8,2.4 r0 bottom value=1K (schematic designator R19)
R19_W2 "1k" MY_0402 22.7,17.5 r0 bottom value=1K (schematic designator R19)
R19_W3 "1k" MY_0402 7.985,28.7 r180 bottom value=1K (schematic designator R19)
R19_W4 "1k" MY_0402 8.041,13.65 r180 bottom value=1K (schematic designator R19)
R20_U1 "6.8k" MY_0402 20.2,13.4 r90 top value=1K (schematic designator R20)
R20_U2 "6.8k" MY_0402 20.1,28.5 r90 top value=1K (schematic designator R20)
R20_U3 "6.8k" MY_0402 10.585,17.7 r270 top value=1K (schematic designator R20)
R20_U4 "6.8k" MY_0402 10.641,2.65 r270 top value=1K (schematic designator R20)
R20_V1 "6.8k" MY_0402 17.8,9.3 r90 top value=1K (schematic designator R20)
R20_V2 "6.8k" MY_0402 17.8,24.4 r90 top value=1K (schematic designator R20)
R20_V3 "6.8k" MY_0402 12.985,21.8 r270 top value=1K (schematic designator R20)
R20_V4 "6.8k" MY_0402 12.9,6.7 r270 top value=1K (schematic designator R20)
R20_W1 "6.8k" MY_0402 24,2.4 r0 top value=1K (schematic designator R20)
R20_W2 "6.8k" MY_0402 23.9,17.5 r0 top value=1K (schematic designator R20)
R20_W3 "6.8k" MY_0402 6.785,28.7 r180 top value=1K (schematic designator R20)
R20_W4 "6.8k" MY_0402 6.841,13.65 r180 top value=1K (schematic designator R20)
RX_C1 "RX" solder_pin_small#5 -0.4,13.1 r0 top (schematic designator RX)
RX_C2 "RX" solder_pin_small#2 24.9,28.2 r0 top (schematic designator RX)
RX_C3 "RX" solder_pin_small#6 105.785,18 r180 top (schematic designator RX)
RX_C4 "RX" solder_pin_small#7 13.461,2.95 r180 top (schematic designator RX)
U_C1 "U" solder_pin_small#2 24.3,14.8 r180 bottom (schematic designator U)
U_C2 "U" solder_pin_small#2 24.2,29.9 r180 bottom (schematic designator U)
U_C3 "U" solder_pin_small#2 6.485,16.3 r0 bottom (schematic designator U)
U_C4 "U" solder_pin_small#2 6.541,1.05 r0 bottom (schematic designator U)
V_C1 "V" solder_pin_small#8 -7.86,10.5 r180 bottom (schematic designator V)
V_C2 "V" solder_pin_small#9 22.52,25.6 r180 bottom (schematic designator V)
V_C3 "V" solder_pin_small#10 23.085,20.6 r0 bottom (schematic designator V)
V_C4 "V" solder_pin_small#9 8.221,5.55 r0 bottom (schematic designator V)
W_C1 "W" solder_pin_small#2 29.8,1.9 r180 bottom (schematic designator W)
W_C2 "W" solder_pin_small#2 29.8,17.1 r180 bottom (schematic designator W)
W_C3 "W" solder_pin_small#10 20.985,29.2 r0 bottom (schematic designator W)
W_C4 "W" solder_pin_small#11 3.581,14.15 r0 bottom (schematic designator W)

## Footprints (in the part's own frame and the unit in brackets; to place one, negate y for a bottom-side part, rotate by r counter-clockwise, add the part's x,y. Pads: shape width x height; smd on the part's side, far side on the other; paste and mask are expansions set on the pad)
IND_3_3 [mm]
  rect 1x2.7 smd: 1(-1.2,0) 2(1.2,0)
  silkscreen extent -0.1,-1.6 0.15,1.55, body extent -2,-1.65 2,1.65, height 2.5
large_pin [mm]
  round 1.8 hole 1.1: 1(0,0)
Micro3 [mm] "SOT23, 3-Leads, Body 2.92x2.37mm, Pitch 0.95mm, IPC High Density"
  rect 0.8x0.55 smd: D(1.1,0) G(-1.1,0.95) S(-1.1,-0.95)
  silkscreen extent -0.3,-1.5 0.7,1.5, body extent -1.32,-1.52 1.32,1.52, height 1.12
MY_0402 [mm] "Chip Resistor, 2-Leads, Body 1.00x0.50mm, IPC Medium Density"
  rect 0.55x0.55 smd mask+0: 1(-0.475,0) 2(0.475,0)
  body extent -0.5,-0.25 0.5,0.25, height 0.5
my_0603 [mm] "0603 without silkscreen issues"
  rect 0.965x0.85 smd: 1(-0.825,0) 2(0.825,0)
  silkscreen extent -0.01,-0.41 0.01,0.41, body extent -0.8,-0.4 0.8,0.4, height 3
MY_0603 [mm] "0603 without silkscreen issues"
  rect 0.965x0.85 smd: 1(-0.825,0) 2(0.825,0)
  silkscreen extent -0.01,-0.41 0.01,0.41, body extent -0.8,-0.4 0.8,0.4, height 3
my_1206_pol [mm] "Molded Capacitor, 2-Leads, Body 3.20x1.65mm, IPC High Density"
  rect 1.55x1.2 smd: 1(-1.1,0) 2(1.1,0)
  silkscreen extent -2.12,-0.95 1.7,0.95, body extent -1.7,-0.9 1.7,0.9, height 1.6
my_1210_pol [mm] "Molded Capacitor, 2-Leads, Body 3.50x2.80mm, IPC High Density"
  rect 1.55x2.2 smd: 1(-1.25,0) 2(1.25,0)
  silkscreen extent -2.65,-1.5 1.9,1.8, body extent -1.85,-1.5 1.85,1.5, height 1.9
rad_2.5mm_0.7mm [mm] "alu cap 2.5mm between leeds 0.7mm lead d"
  round 1.2 hole 0.7: 1(-1.25,0) 2(1.25,0)
solder_pin_small#1 [mm] "pin for soldering"
  oval 0.7x1 smd: 1(-27.94,0)
solder_pin_small#2 [mm] "pin for soldering"
  oval 0.7x1 smd: 1(0,0)
solder_pin_small#3 [mm] "pin for soldering"
  oval 0.7x1 smd: 1(12.7,0)
solder_pin_small#4 [mm] "pin for soldering"
  oval 0.7x1 smd: 1(-12.7,0)
solder_pin_small#5 [mm] "pin for soldering"
  oval 0.7x1 smd: 1(25.4,0)
solder_pin_small#6 [mm] "pin for soldering"
  oval 0.7x1 smd: 1(100,0)
solder_pin_small#7 [mm] "pin for soldering"
  oval 0.7x1 smd: 1(7.62,0)
solder_pin_small#8 [mm] "pin for soldering"
  oval 0.7x1 smd: 1(-35.56,0)
solder_pin_small#9 [mm] "pin for soldering"
  oval 0.7x1 smd: 1(-5.08,0)
solder_pin_small#10 [mm] "pin for soldering"
  oval 0.7x1 smd: 1(-20,0)
solder_pin_small#11 [mm] "pin for soldering"
  oval 0.7x1 smd: 1(-2.54,0)
VFQFPN48 [mm] "QFN, 48-Leads, Body 7.00x7.00mm, Pitch 0.50mm, Thermal Pad 2.60x2.60mm, IPC Medium Density"
  oval 0.85x0.3 smd: 1(-3.475,2.75) 2(-3.475,2.25) 3(-3.475,1.75) 4(-3.475,1.25) 5(-3.475,0.75) 6(-3.475,0.25) 7(-3.475,-0.25) 8(-3.475,-0.75) 9(-3.475,-1.25) 10(-3.475,-1.75) 11(-3.475,-2.25) 12(-3.475,-2.75) 25(3.475,-2.75) 26(3.475,-2.25) 27(3.475,-1.75) 28(3.475,-1.25) 29(3.475,-0.75) 30(3.475,-0.25) 31(3.475,0.25) 32(3.475,0.75) 33(3.475,1.25) 34(3.475,1.75) 35(3.475,2.25) 36(3.475,2.75)
  oval 0.3x0.85 smd: 13(-2.75,-3.475) 14(-2.25,-3.475) 15(-1.75,-3.475) 16(-1.25,-3.475) 17(-0.75,-3.475) 18(-0.25,-3.475) 19(0.25,-3.475) 20(0.75,-3.475) 21(1.25,-3.475) 22(1.75,-3.475) 23(2.25,-3.475) 24(2.75,-3.475) 37(2.75,3.475) 38(2.25,3.475) 39(1.75,3.475) 40(1.25,3.475) 41(0.75,3.475) 42(0.25,3.475) 43(-0.25,3.475) 44(-0.75,3.475) 45(-1.25,3.475) 46(-1.75,3.475) 47(-2.25,3.475) 48(-2.75,3.475)
  rect 2.6x2.6 smd: EPAD(0,0)
  silkscreen extent -4.17,-3.7 3.7,3.7, body extent -3.55,-3.55 3.55,3.55, height 0.95

## Part data
12V BT_C1 BT_C2 BT_C3 BT_C4 CK_C1 CK_C2 CK_C3 CK_C4 G IO_C1 IO_C2 IO_C3 IO_C4 RX_C1 RX_C2 RX_C3 RX_C4 U_C1 U_C2 U_C3 U_C4 V_C1 V_C2 V_C3 V_C4 W_C1 W_C2 W_C3 W_C4: library part Socket, "Socket", LatestRevisionDate=17-Jul-2002, LatestRevisionNote="Re-released for DXP Platform.", Publisher="Altium Limited"
C1_C1 C1_C2 C1_C3 C1_C4 C2_C1 C2_C2 C2_C3 C2_C4 C3_C1 C3_C2 C3_C3 C3_C4 C5_C1 C5_C2 C5_C3 C5_C4 C6_C1 C6_C2 C6_C3 C6_C4 C7_C1 C7_C2 C7_C3 C7_C4 C8_C1 C8_C2 C8_C3 C8_C4 C9_C1 C9_C2 C9_C3 C9_C4 C10_C1 C10_C2 C10_C3 C10_C4 C11_C1 C11_C2 C11_C3 C11_C4 C12_C1 C12_C2 C12_C3 C12_C4 C14_C1 C14_C2 C14_C3 C14_C4 C15_C1 C15_C2 C15_C3 C15_C4 C17_U1 C17_U2 C17_U3 C17_U4 C17_V1 C17_V2 C17_V3 C17_V4 C17_W1 C17_W2 C17_W3 C17_W4 C18_U1 C18_U2 C18_U3 C18_U4 C18_V1 C18_V2 C18_V3 C18_V4 C18_W1 C18_W2 C18_W3 C18_W4 C19_U1 C19_U2 C19_U3 C19_U4 C19_V1 C19_V2 C19_V3 C19_V4 C19_W1 C19_W2 C19_W3 C19_W4 C23: library part Cap, "Capacitor", LatestRevisionDate=17-Jul-2002, LatestRevisionNote="Re-released for DXP Platform.", PackageDescription="Radial Cap, Thru-Hole; 2 Leads; 0.3 in Pin Spacing", PackageReference=RAD-0.3, Published=8-Jun-2000, Publisher="Altium Limited"
C4_C1 C4_C2 C4_C3 C4_C4 C13_C1 C13_C2 C13_C3 C13_C4 C20 C21 C22: library part "Cap Pol3", "Polarized Capacitor (Surface Mount)", LatestRevisionDate=29-May-2009, LatestRevisionNote="IPC-7351 Footprint Added.", PackageDescription="Chip Capacitor", PackageReference=C0805, Published=8-Jun-2000, Publisher="Altium Limited"
D1_U1 D1_U2 D1_U3 D1_U4 D1_V1 D1_V2 D1_V3 D1_V4 D1_W1 D1_W2 D1_W3 D1_W4 D2_U1 D2_U2 D2_U3 D2_U4 D2_V1 D2_V2 D2_V3 D2_V4 D2_W1 D2_W2 D2_W3 D2_W4 D3: library part Diode, "Default Diode", Code_JEDEC=DO-214-AB, LatestRevisionDate=17-Jul-2002, LatestRevisionNote="Re-released for DXP Platform.", PackageDescription="DO-214-AB/SMC; 2 C-Bend Leads; Body 7.9 x 5.9 mm, inc. leads (LxW)", PackageReference=SMC, PackageVersion=Sep-1996, Published=8-Jun-2000, Publisher="Altium Limited"
L1: library part Inductor, "Inductor", Code_IEC=1005, Code_JEITA=0402, LatestRevisionDate=29-May-2009, LatestRevisionNote="IPC-7351 Footprint Added.", PackageDescription="Chip Inductor", PackageReference=0402-A, Published=8-Jun-2000, Publisher="Altium Limited"
Q2_U1 Q2_U2 Q2_U3 Q2_U4 Q2_V1 Q2_V2 Q2_V3 Q2_V4 Q2_W1 Q2_W2 Q2_W3 Q2_W4 Q3_U1 Q3_U2 Q3_U3 Q3_U4 Q3_V1 Q3_V2 Q3_V3 Q3_V4 Q3_W1 Q3_W2 Q3_W3 Q3_W4: library part MOSFET-N, "N-Channel MOSFET", LatestRevisionDate=17-Jul-2002, LatestRevisionNote="Re-released for DXP Platform.", PackageDescription="TO, Flat Index; 3 In-Line, Axial Leads; Body Dia. 4.6mm; Lead Dia. 0.5 mm (max)", PackageReference=E3, PackageVersion=1995/1996, Published=8-Jun-2000, Publisher="Altium Limited"
R1_U1 R1_U2 R1_U3 R1_U4 R1_V1 R1_V2 R1_V3 R1_V4 R1_W1 R1_W2 R1_W3 R1_W4 R2_U1 R2_U2 R2_U3 R2_U4 R2_V1 R2_V2 R2_V3 R2_V4 R2_W1 R2_W2 R2_W3 R2_W4 R3_U1 R3_U2 R3_U3 R3_U4 R3_V1 R3_V2 R3_V3 R3_V4 R3_W1 R3_W2 R3_W3 R3_W4 R4_U1 R4_U2 R4_U3 R4_U4 R4_V1 R4_V2 R4_V3 R4_V4 R4_W1 R4_W2 R4_W3 R4_W4 R5_U1 R5_U2 R5_U3 R5_U4 R5_V1 R5_V2 R5_V3 R5_V4 R5_W1 R5_W2 R5_W3 R5_W4 R6_C1 R6_C2 R6_C3 R6_C4 R7_C1 R7_C2 R7_C3 R7_C4 R8_C1 R8_C2 R8_C3 R8_C4 R9_C1 R9_C2 R9_C3 R9_C4 R10_C1 R10_C2 R10_C3 R10_C4 R11_C1 R11_C2 R11_C3 R11_C4 R12_C1 R12_C2 R12_C3 R12_C4 R13_C1 R13_C2 R13_C3 R13_C4 R14_C1 R14_C2 R14_C3 R14_C4 R15_C1 R15_C2 R15_C3 R15_C4 R16_C1 R16_C2 R16_C3 R16_C4 R17_U1 R17_U2 R17_U3 R17_U4 R17_V1 R17_V2 R17_V3 R17_V4 R17_W1 R17_W2 R17_W3 R17_W4 R18_U1 R18_U2 R18_U3 R18_U4 R18_V1 R18_V2 R18_V3 R18_V4 R18_W1 R18_W2 R18_W3 R18_W4 R19_U1 R19_U2 R19_U3 R19_U4 R19_V1 R19_V2 R19_V3 R19_V4 R19_W1 R19_W2 R19_W3 R19_W4 R20_U1 R20_U2 R20_U3 R20_U4 R20_V1 R20_V2 R20_V3 R20_V4 R20_W1 R20_W2 R20_W3 R20_W4: library part Res3, "Resistor", LatestRevisionDate=29-May-2009, LatestRevisionNote="IPC-7351 Footprint Added.", PackageDescription="Chip Resistor", PackageReference=J1-0603, Published=8-Jun-2000, Publisher="Altium Limited"

## Via types
v1: diameter 0.45, hole 0.15, Top Layer to Bottom Layer, tented both sides, 344 vias
v2: diameter 0.5, hole 0.2, Top Layer to Bottom Layer, tented both sides, 12 vias
v3: diameter 0.5, hole 0.2, Top Layer to Bottom Layer, 4 vias